# EAGLE board CT_schematic (EAGLE 7.6.0)

Size 100 x 80 mm. Coordinates in mm from the lower left corner, seen from the top.
Outline: 0,0 100,0 100,80 0,80 0,0
Copper layers (1*16): Top 0.035mm / dielectric 1.5mm / Bottom 0.035mm
Design rules "default": minimum track width 10mil, minimum drill 24mil, track to track 8mil, track to pad 8mil, pad to pad 8mil, via to via 8mil, smd to smd 8mil, copper to edge 40mil, drill to drill 8mil, minimum pad ring 10mil, minimum via ring 8mil, stop-mask expansion 4mil, vias tented up to drill 0mil, thermal gap 10mil

## Footprints (pad centres in the part's own frame; a part is rotated, then mirrored left to right if it is on the bottom)
C0603 = smd 0.8 x 0.8: 1 -0.762,0; 2 0.762,0
C0402 = smd 0.5 x 0.5: 1 -0.508,0; 2 0.508,0
EXV-9B = smd 2.718 x 1.778: 1 -2.108,0; 2 2.108,0
EXV-9H = smd 3.505 x 1.676: 1 -2.857,0; 2 2.857,0
L0603 = smd 0.8 x 0.8: 1 -0.762,0; 2 0.762,0
L1210 = smd 1.2 x 2.5: 1 -1.524,0; 2 1.524,0
PJ-037B_PACKAGE = drill 3.7 square: 1 12,0 | drill 3.2 square: 2 6,0
R0603 = smd 0.8 x 0.8: 1 -0.762,0; 2 0.762,0
TSSOP20 = smd 1.473 x 0.356: 1 -2.819,2.921; 2 -2.819,2.286; 3 -2.819,1.626; 4 -2.819,0.965; 5 -2.819,0.33; 6 -2.819,-0.33; 7 -2.819,-0.965; 8 -2.819,-1.626; 9 -2.819,-2.286; 10 -2.819,-2.921; 11 2.819,-2.921; 12 2.819,-2.286; 13 2.819,-1.626; 14 2.819,-0.965; 15 2.819,-0.33; 16 2.819,0.33; 17 2.819,0.965; 18 2.819,1.626; 19 2.819,2.286; 20 2.819,2.921
SSOP-16 = smd 1.981 x 0.356: 1 -2.464,2.223; 2 -2.464,1.587; 3 -2.464,0.953; 4 -2.464,0.318; 5 -2.464,-0.318; 6 -2.464,-0.953; 7 -2.464,-1.587; 8 -2.464,-2.223; 9 2.464,-2.223; 10 2.464,-1.587; 11 2.464,-0.953; 12 2.464,-0.318; 13 2.464,0.318; 14 2.464,0.953; 15 2.464,1.587; 16 2.464,2.223
182-009-MALE = drill 1.194 pad 1.524 octagon: 1 -5.537,10.923; 2 -2.769,10.923; 3 0,10.923; 4 2.769,10.923; 5 5.537,10.923; 6 -4.153,8.08; 7 -1.384,8.08; 8 1.384,8.08; 9 4.153,8.08 | hole 3.048: -12.446,9.501; 12.446,9.501
ABLS-25.000MHZ-B2F-T = smd 5.6 x 2.8: 1 -3.81,0; 2 5.69,0
LP2954 = smd 1.6 x 0.6: 1 -2.475,1.905 | smd 1.55 x 0.6: 2 -2.475,0.635; 3 -2.475,-0.635; 4 -2.475,-1.905; 5 2.475,-1.905; 6 2.475,-0.635; 7 2.475,0.635; 8 2.475,1.905
SON-6 = smd 0.55 x 0.3: 1 -0.355,0.5 | smd 0.52 x 0.3: 2 -0.37,0; 3 -0.37,-0.5; 4 0.37,-0.5; 5 0.37,0; 6 0.37,0.5
SW_4-1437565-2 = smd 1.4 x 2.1: 1 -2.23,4.55; 2 -2.23,-4.55; 3 2.23,4.55; 4 2.23,-4.55
LGM67K-G1J2-24-Z = smd 0.8 x 1.4: A -2,0; C 0,0
NC7SZ125M5X = smd 1.3 x 0.7: 1 -1.3,0.95; 2 -1.3,0; 3 -1.3,-0.95; 4 1.3,-0.95; 5 1.3,0.95
DUMMY_PACKAGE_89 = drill 0.3: 1 0,-1; 2 1.5,-1; 3 3,-1

## Placement (x,y rotation side)
C1  1e-07  [C0603]  -46.99,67.31 0 top  (outside the outline)
C2  1e-07  [C0603]  -50.8,67.31 0 top  (outside the outline)
C3  4.7e-06  [C0603]  -39.37,67.31 0 top  (outside the outline)
C4  1e-08  [C0603]  -54.61,67.31 0 top  (outside the outline)
C5  1e-06  [C0603]  -58.42,67.31 0 top  (outside the outline)
C6  1e-11  [C0402]  -38.1,72.39 0 top  (outside the outline)
C7  1e-11  [C0402]  -41.91,72.39 0 top  (outside the outline)
C8  1e-06  [C0603]  -62.23,67.31 0 top  (outside the outline)
C9  1e-06  [C0603]  -66.04,67.31 0 top  (outside the outline)
C10  2.2e-07  [C0603]  -43.18,67.31 0 top  (outside the outline)
C11  1e-06  [C0603]  -15.24,72.39 0 top  (outside the outline)
C12  1e-06  [C0603]  -19.05,72.39 0 top  (outside the outline)
C13  1e-06  [EXV-9B]  -16.51,60.96 0 top  (outside the outline)
C14  2.2e-06  [EXV-9B]  -25.4,60.96 0 top  (outside the outline)
C15  1e-07  [C0402]  -45.72,72.39 0 top  (outside the outline)
C16  0.0001  [EXV-9H]  -55.88,43.18 0 top  (outside the outline)
C17  0.0001  [EXV-9H]  -17.78,54.61 0 top  (outside the outline)
C18  1e-08  [C0402]  -49.53,72.39 0 top  (outside the outline)
F1  240.0  [L0603]  -22.86,72.39 0 top  (outside the outline)
I1  1e-05  [L1210]  -59.69,53.34 0 top  (outside the outline)
J1  PJ-037B  [PJ-037B_PACKAGE]  -49.53,29.21 0 top  (outside the outline)
R1  10000.0  [R0603]  -20.32,67.31 0 top  (outside the outline)
R2  1000.0  [R0603]  -26.67,72.39 0 top  (outside the outline)
R3  1270.0  [R0603]  -30.48,72.39 0 top  (outside the outline)
R4  4700.0  [R0603]  -34.29,72.39 0 top  (outside the outline)
R5  100000.0  [R0603]  -45.72,60.96 0 top  (outside the outline)
R6  100000.0  [R0603]  -50.8,60.96 0 top  (outside the outline)
R7  100000.0  [R0603]  -55.88,60.96 0 top  (outside the outline)
R8  101022.32  [R0603]  -40.64,60.96 0 top  (outside the outline)
R9  100000.0  [R0603]  -60.96,60.96 0 top  (outside the outline)
R10  10000.0  [R0603]  -25.4,67.31 0 top  (outside the outline)
R11  10000.0  [R0603]  -30.48,67.31 0 top  (outside the outline)
R12  18000.0  [R0603]  -35.56,67.31 0 top  (outside the outline)
R13  470000.0  [R0603]  -66.04,60.96 0 top  (outside the outline)
R14  120000.0  [R0603]  -15.24,67.31 0 top  (outside the outline)
U1  stm32f042f6p7  [TSSOP20]  -30.48,30.48 0 top  (outside the outline)
U2  LTC2804CGN-1#PBF  [SSOP-16]  -29.21,44.45 0 top  (outside the outline)
U3  182-009-113R531  [182-009-MALE]  -36.83,6.35 0 top  (outside the outline)
U4  ABLS-25.000MHZ-B2F-T  [ABLS-25.000MHZ-B2F-T]  -36.83,54.61 0 top  (outside the outline)
U5  LP2954AIMX/NOPB  [LP2954]  -45.72,44.45 0 top  (outside the outline)
U6  TPS3895ADRYR  [SON-6]  -58.42,71.12 0 top  (outside the outline)
U7  4-1437565-2  [SW_4-1437565-2]  -66.04,27.94 0 top  (outside the outline)
U8  Q65110A2395  [LGM67K-G1J2-24-Z]  -48.26,53.34 0 top  (outside the outline)
U9  nc7sz125m5x  [NC7SZ125M5X]  -33.02,60.96 0 top  (outside the outline)
U10  Dummy  [DUMMY_PACKAGE_89]  -55.88,72.39 0 top  (outside the outline)

## Library data of the parts
C1-C18 F1 I1 J1 R1-R14 U1-U10 = circuit_tree

## Nets
CLK_CRYSTAL_U1_2: C6.1 U1.2 U4.1
CLK_CRYSTAL_U1_3: C7.1 U1.3 U4.2
GND: C1.2 C2.2 C3.2 C4.2 C5.2 C6.2 C7.2 C8.2 C9.2 C11.2 C12.2 C13.2 C14.2 C15.2 C16.2 C17.2 C18.2 J1.2 R2.2 R9.2 R12.2 R14.2 U1.15 U2.8 U3.5 U5.4 U6.2 U8.C U9.1 U9.3 U10.1
NET_U1_4: R4.1 U1.4 U9.4
NET_U1_5: C4.1 C5.1 F1.1 U1.5
NET_U1_19: R3.1 U1.19 U8.A
NET_U1_20: R1.1 U1.20 U7.3 U7.4
NET_U2_6: C8.1 U2.6
NET_U2_7: C10.1 I1.2 U2.7
NET_U2_9: C9.1 U2.9
NET_U2_10: C10.2 U2.10
NET_U2_11: R5.1 U2.11
NET_U3_2: U2.1 U3.2
NET_U3_3: U2.3 U3.3
NET_U3_7: U2.2 U3.7
NET_U3_8: U2.4 U3.8
NET_U5_3: R7.1 U5.3
NET_U5_5: R6.1 U5.5
NET_U5_7: R8.2 R9.1 U5.7
NET_U6_1: R11.1 R12.1 U6.1
NET_U6_3: R13.2 R14.1 U6.3
NET_U6_4: R10.1 U6.4 U9.2
NET_U7_1: R2.1 U7.1 U7.2
PROC_TIM1_CH1N: U1.13 U10.3
PROC_TIM1_CH3N: U1.14 U10.2
PROC_USART1_RX: U1.18 U2.16
PROC_USART1_TX: U1.17 U2.14
VCC_S1_13V6: C13.1 C16.1 C17.1 J1.1 R7.2 U5.8
VCC_TIER1_2V5: C1.1 C2.1 C3.1 C11.1 C12.1 C14.1 C15.1 C18.1 F1.2 I1.1 R1.2 R3.2 R4.2 R5.2 R6.2 R8.1 R10.2 R11.2 R13.1 U1.16 U2.5 U2.12 U5.1 U6.6 U9.5

## Tracks (layer width: path | path; a pad name or v marks a point on that pad's centre or on a via)
CLK_CRYSTAL_U1_2  (2 unrouted)
CLK_CRYSTAL_U1_3  (2 unrouted)
GND  (30 unrouted)
NET_U1_4  (2 unrouted)
NET_U1_5  (3 unrouted)
NET_U1_19  (2 unrouted)
NET_U1_20  (3 unrouted)
NET_U2_6  (1 unrouted)
NET_U2_7  (2 unrouted)
NET_U2_9  (1 unrouted)
NET_U2_10  (1 unrouted)
NET_U2_11  (1 unrouted)
NET_U3_2  (1 unrouted)
NET_U3_3  (1 unrouted)
NET_U3_7  (1 unrouted)
NET_U3_8  (1 unrouted)
NET_U5_3  (1 unrouted)
NET_U5_5  (1 unrouted)
NET_U5_7  (2 unrouted)
NET_U6_1  (2 unrouted)
NET_U6_3  (2 unrouted)
NET_U6_4  (2 unrouted)
NET_U7_1  (2 unrouted)
PROC_TIM1_CH1N  (1 unrouted)
PROC_TIM1_CH3N  (1 unrouted)
PROC_USART1_RX  (1 unrouted)
PROC_USART1_TX  (1 unrouted)
VCC_S1_13V6  (5 unrouted)
VCC_TIER1_2V5  (24 unrouted)